# EAGLE board Panelized-TheLittleEngineers.org-27C512E-TO-2532S-V1R1.20.APRIL.2019 (EAGLE 5.10)
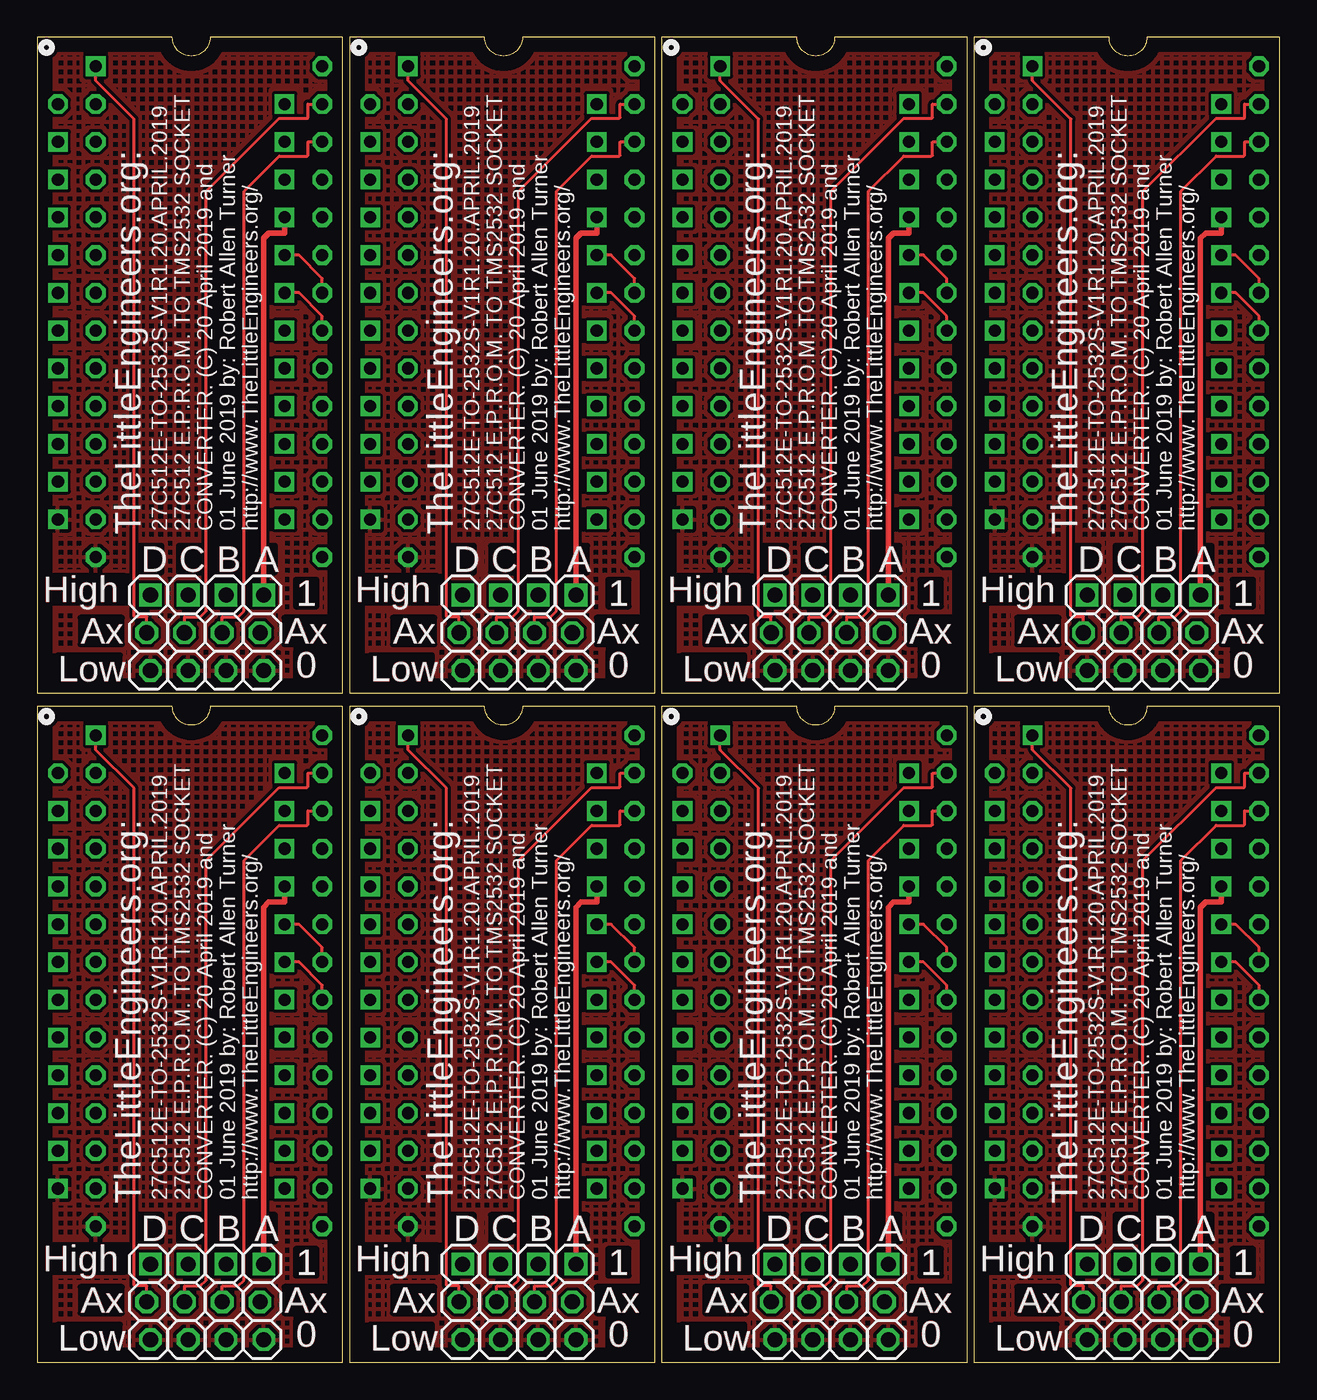
[diagram p0: board, top side]
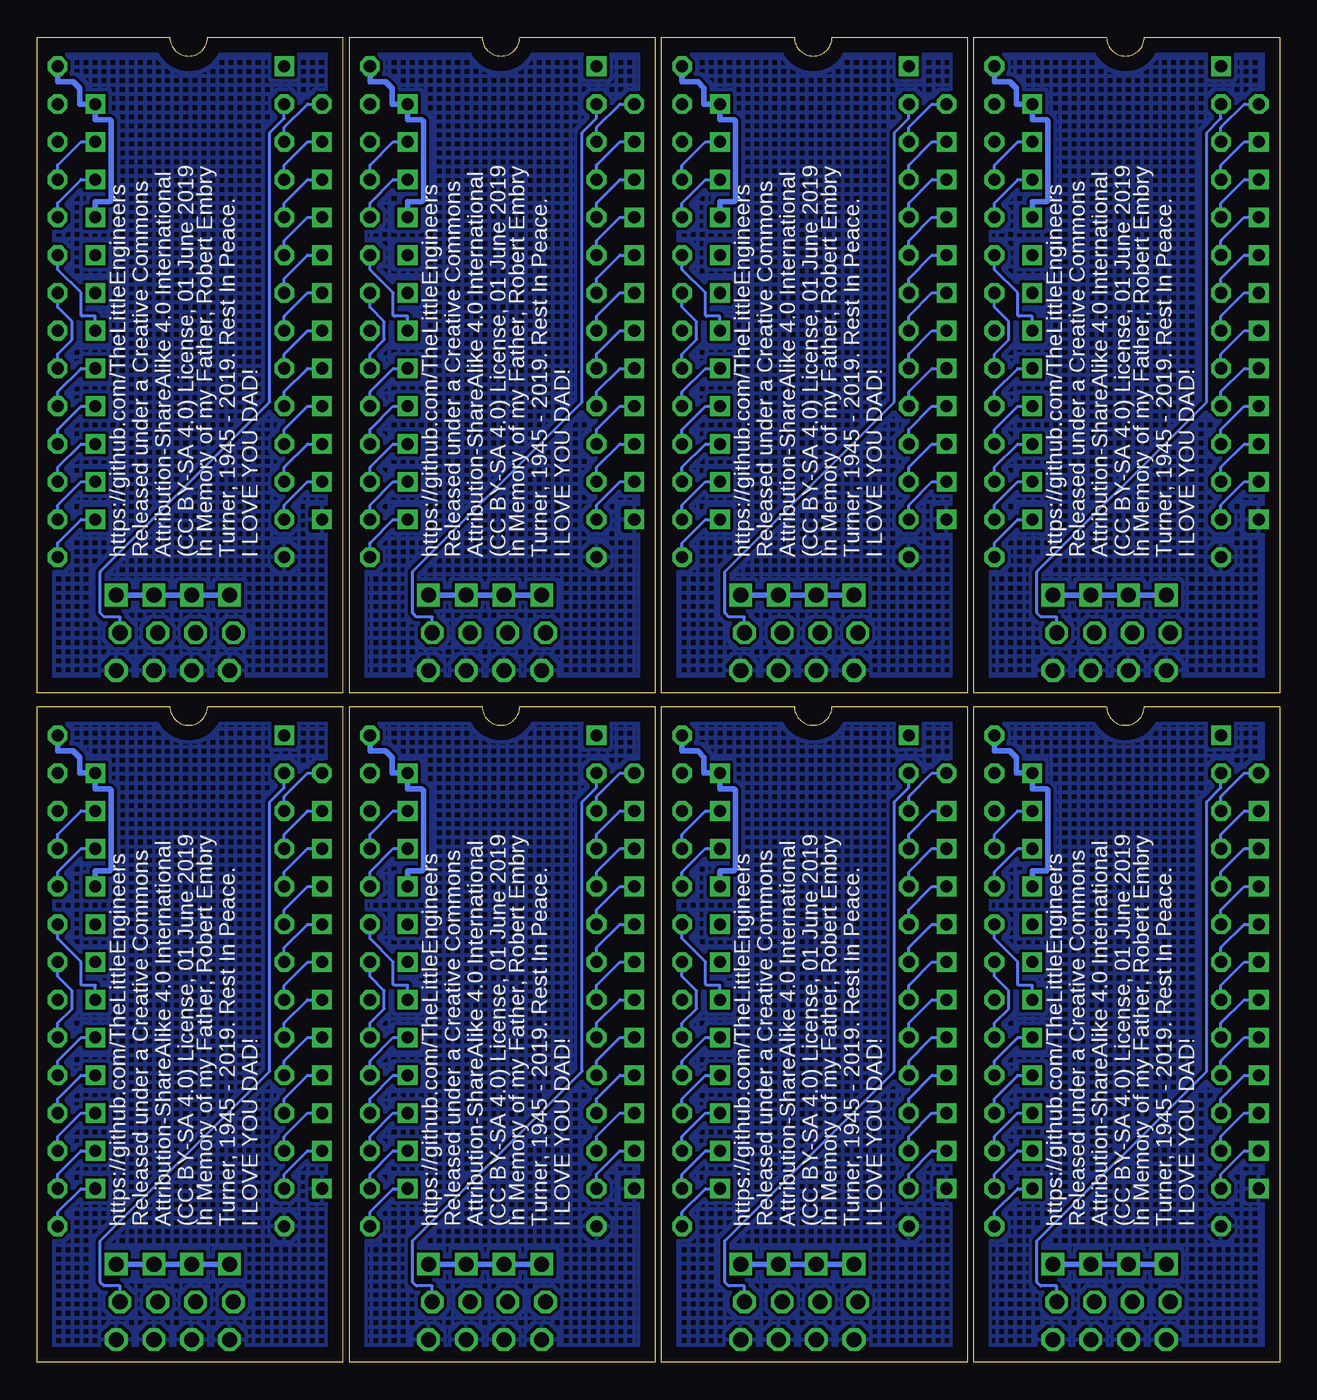
[diagram p1: board, bottom side, seen from below]

Size 83.55 x 89.12 mm. Coordinates in mm from the lower left corner, seen from the top.
Copper layers (1*16): Top 0.035mm / dielectric 1.5mm / Bottom 0.035mm
Design rules "default": minimum track width 10mil, minimum drill 24mil, track to track 8mil, track to pad 8mil, pad to pad 8mil, via to via 8mil, smd to smd 8mil, copper to edge 40mil, drill to drill 8mil, minimum pad ring 10mil, minimum via ring 8mil, stop-mask expansion 4mil, vias tented up to drill 0mil, thermal gap 10mil
Net classes: 0 default: width 0.203 mm, clearance 0.203 mm; 1 power: width 0.381 mm, clearance 0.203 mm

## Footprints (pad centres in the part's own frame; a part is rotated, then mirrored left to right if it is on the bottom)
1X03-STAGGERED = drill 1.016 square: 1 -2.54,0.127 | drill 1.016 octagon: 2 0,-0.127; 3 2.54,0.127
DIL24-6-NO-OUTLINE = drill 0.813 octagon: 1 -13.97,-7.62 | drill 0.813 square: 2 -11.43,-7.62; 3 -8.89,-7.62; 4 -6.35,-7.62; 5 -3.81,-7.62; 6 -1.27,-7.62; 7 1.27,-7.62; 8 3.81,-7.62; 9 6.35,-7.62; 10 8.89,-7.62; 11 11.43,-7.62; 12 13.97,-7.62; 13 13.97,7.62; 14 11.43,7.62; 15 8.89,7.62; 16 6.35,7.62; 17 3.81,7.62; 18 1.27,7.62; 19 -1.27,7.62; 20 -3.81,7.62; 21 -6.35,7.62; 22 -8.89,7.62; 23 -11.43,7.62; 24 -13.97,7.62
DIL28-6-NO-OUTLINE = drill 0.813 square: 1 -16.51,-7.62 | drill 0.813 octagon: 2 -13.97,-7.62; 3 -11.43,-7.62; 4 -8.89,-7.62; 5 -6.35,-7.62; 6 -3.81,-7.62; 7 -1.27,-7.62; 8 1.27,-7.62; 9 3.81,-7.62; 10 6.35,-7.62; 11 8.89,-7.62; 12 11.43,-7.62; 13 13.97,-7.62; 14 16.51,-7.62; 15 16.51,7.62; 16 13.97,7.62; 17 11.43,7.62; 18 8.89,7.62; 19 6.35,7.62; 20 3.81,7.62; 21 1.27,7.62; 22 -1.27,7.62; 23 -3.81,7.62; 24 -6.35,7.62; 25 -8.89,7.62; 26 -11.43,7.62; 27 -13.97,7.62; 28 -16.51,7.62

## Placement (x,y rotation side)
A1  [1X03-STAGGERED]  15.11,49.06 270 top
A2  [1X03-STAGGERED]  12.57,49.06 270 top
A3  [1X03-STAGGERED]  10.03,49.06 270 top
A4  [1X03-STAGGERED]  7.49,49.06 270 top
A5  [1X03-STAGGERED]  36.11,49.06 270 top
A6  [1X03-STAGGERED]  33.57,49.06 270 top
A7  [1X03-STAGGERED]  31.03,49.06 270 top
A8  [1X03-STAGGERED]  28.49,49.06 270 top
A9  [1X03-STAGGERED]  57.11,49.06 270 top
A10  [1X03-STAGGERED]  54.57,49.06 270 top
A11  [1X03-STAGGERED]  52.03,49.06 270 top
A12  [1X03-STAGGERED]  49.49,49.06 270 top
A13  [1X03-STAGGERED]  78.11,49.06 270 top
A14  [1X03-STAGGERED]  75.57,49.06 270 top
A15  [1X03-STAGGERED]  73.03,49.06 270 top
A16  [1X03-STAGGERED]  70.49,49.06 270 top
A17  [1X03-STAGGERED]  15.11,4.06 270 top
A18  [1X03-STAGGERED]  12.57,4.06 270 top
A19  [1X03-STAGGERED]  10.03,4.06 270 top
A20  [1X03-STAGGERED]  7.49,4.06 270 top
A21  [1X03-STAGGERED]  36.11,4.06 270 top
A22  [1X03-STAGGERED]  33.57,4.06 270 top
A23  [1X03-STAGGERED]  31.03,4.06 270 top
A24  [1X03-STAGGERED]  28.49,4.06 270 top
A25  [1X03-STAGGERED]  57.11,4.06 270 top
A26  [1X03-STAGGERED]  54.57,4.06 270 top
A27  [1X03-STAGGERED]  52.03,4.06 270 top
A28  [1X03-STAGGERED]  49.49,4.06 270 top
A29  [1X03-STAGGERED]  78.11,4.06 270 top
A30  [1X03-STAGGERED]  75.57,4.06 270 top
A31  [1X03-STAGGERED]  73.03,4.06 270 top
A32  [1X03-STAGGERED]  70.49,4.06 270 top
IC1  [DIL24-6-NO-OUTLINE]  9.02,70.65 270 top
IC2  [DIL28-6-NO-OUTLINE]  11.56,70.65 270 top
IC3  [DIL24-6-NO-OUTLINE]  30.02,70.65 270 top
IC4  [DIL28-6-NO-OUTLINE]  32.56,70.65 270 top
IC5  [DIL24-6-NO-OUTLINE]  51.02,70.65 270 top
IC6  [DIL28-6-NO-OUTLINE]  53.56,70.65 270 top
IC7  [DIL24-6-NO-OUTLINE]  72.02,70.65 270 top
IC8  [DIL28-6-NO-OUTLINE]  74.56,70.65 270 top
IC9  [DIL24-6-NO-OUTLINE]  9.02,25.65 270 top
IC10  [DIL28-6-NO-OUTLINE]  11.56,25.65 270 top
IC11  [DIL24-6-NO-OUTLINE]  30.02,25.65 270 top
IC12  [DIL28-6-NO-OUTLINE]  32.56,25.65 270 top
IC13  [DIL24-6-NO-OUTLINE]  51.02,25.65 270 top
IC14  [DIL28-6-NO-OUTLINE]  53.56,25.65 270 top
IC15  [DIL24-6-NO-OUTLINE]  72.02,25.65 270 top
IC16  [DIL28-6-NO-OUTLINE]  74.56,25.65 270 top
U$1  [OUTLINE]  1.4,45.25 0 top
U$2  [OUTLINE]  22.4,45.25 0 top
U$3  [OUTLINE]  43.4,45.25 0 top
U$4  [OUTLINE]  64.4,45.25 0 top
U$5  [OUTLINE]  1.4,0.25 0 top
U$6  [OUTLINE]  22.4,0.25 0 top
U$7  [OUTLINE]  43.4,0.25 0 top
U$8  [OUTLINE]  64.4,0.25 0 top

## Library data of the parts
A1-A32 IC1-IC16 U$1-U$8 = TheLittleEngineers.org-27C512E-TO-2532S-V1R0.20.APRIL.2019

## Nets
!CE: IC1.20 IC2.20 IC2.22
!CE1: IC3.20 IC4.20 IC4.22
!CE2: IC5.20 IC6.20 IC6.22
!CE3: IC7.20 IC8.20 IC8.22
!CE4: IC9.20 IC10.20 IC10.22
!CE5: IC11.20 IC12.20 IC12.22
!CE6: IC13.20 IC14.20 IC14.22
!CE7: IC15.20 IC16.20 IC16.22
A0: IC1.8 IC2.10
A1: IC1.7 IC2.9
A2: IC1.6 IC2.8
A3: IC1.5 IC2.7
A4: IC1.4 IC2.6
A5: IC1.3 IC2.5
A6: IC1.2 IC2.4
A7: IC1.1 IC2.3
A8: IC1.23 IC2.25
A9: IC1.22 IC2.24
A10: IC1.19 IC2.21
A11: IC1.18 IC2.23
A12: A1.2 IC2.2
A13: A2.2 IC2.26
A14: A3.2 IC2.27
A15: A4.2 IC2.1
A16: IC3.8 IC4.10
A17: IC3.7 IC4.9
A18: IC3.6 IC4.8
A19: IC3.5 IC4.7
A20: IC3.4 IC4.6
A21: IC3.3 IC4.5
A22: IC3.2 IC4.4
A23: IC3.1 IC4.3
A24: IC3.23 IC4.25
A25: IC3.22 IC4.24
A26: IC3.19 IC4.21
A27: IC3.18 IC4.23
A28: A5.2 IC4.2
A29: A6.2 IC4.26
A30: A7.2 IC4.27
A31: A8.2 IC4.1
A32: IC5.8 IC6.10
A33: IC5.7 IC6.9
A34: IC5.6 IC6.8
A35: IC5.5 IC6.7
A36: IC5.4 IC6.6
A37: IC5.3 IC6.5
A38: IC5.2 IC6.4
A39: IC5.1 IC6.3
A40: IC5.23 IC6.25
A41: IC5.22 IC6.24
A42: IC5.19 IC6.21
A43: IC5.18 IC6.23
A44: A9.2 IC6.2
A45: A10.2 IC6.26
A46: A11.2 IC6.27
A47: A12.2 IC6.1
A48: IC7.8 IC8.10
A49: IC7.7 IC8.9
A50: IC7.6 IC8.8
A51: IC7.5 IC8.7
A52: IC7.4 IC8.6
A53: IC7.3 IC8.5
A54: IC7.2 IC8.4
A55: IC7.1 IC8.3
A56: IC7.23 IC8.25
A57: IC7.22 IC8.24
A58: IC7.19 IC8.21
A59: IC7.18 IC8.23
A60: A13.2 IC8.2
A61: A14.2 IC8.26
A62: A15.2 IC8.27
A63: A16.2 IC8.1
A64: IC9.8 IC10.10
A65: IC9.7 IC10.9
A66: IC9.6 IC10.8
A67: IC9.5 IC10.7
A68: IC9.4 IC10.6
A69: IC9.3 IC10.5
A70: IC9.2 IC10.4
A71: IC9.1 IC10.3
A72: IC9.23 IC10.25
A73: IC9.22 IC10.24
A74: IC9.19 IC10.21
A75: IC9.18 IC10.23
A76: A17.2 IC10.2
A77: A18.2 IC10.26
A78: A19.2 IC10.27
A79: A20.2 IC10.1
A80: IC11.8 IC12.10
A81: IC11.7 IC12.9
A82: IC11.6 IC12.8
A83: IC11.5 IC12.7
A84: IC11.4 IC12.6
A85: IC11.3 IC12.5
A86: IC11.2 IC12.4
A87: IC11.1 IC12.3
A88: IC11.23 IC12.25
A89: IC11.22 IC12.24
A90: IC11.19 IC12.21
A91: IC11.18 IC12.23
A92: A21.2 IC12.2
A93: A22.2 IC12.26
A94: A23.2 IC12.27
A95: A24.2 IC12.1
A96: IC13.8 IC14.10
A97: IC13.7 IC14.9
A98: IC13.6 IC14.8
A99: IC13.5 IC14.7
A100: IC13.4 IC14.6
A101: IC13.3 IC14.5
A102: IC13.2 IC14.4
A103: IC13.1 IC14.3
A104: IC13.23 IC14.25
A105: IC13.22 IC14.24
A106: IC13.19 IC14.21
A107: IC13.18 IC14.23
A108: A25.2 IC14.2
A109: A26.2 IC14.26
A110: A27.2 IC14.27
A111: A28.2 IC14.1
A112: IC15.8 IC16.10
A113: IC15.7 IC16.9
A114: IC15.6 IC16.8
A115: IC15.5 IC16.7
A116: IC15.4 IC16.6
A117: IC15.3 IC16.5
A118: IC15.2 IC16.4
A119: IC15.1 IC16.3
A120: IC15.23 IC16.25
A121: IC15.22 IC16.24
A122: IC15.19 IC16.21
A123: IC15.18 IC16.23
A124: A29.2 IC16.2
A125: A30.2 IC16.26
A126: A31.2 IC16.27
A127: A32.2 IC16.1
D0: IC1.9 IC2.11
D1: IC1.10 IC2.12
D2: IC1.11 IC2.13
D3: IC1.13 IC2.15
D4: IC1.14 IC2.16
D5: IC1.15 IC2.17
D6: IC1.16 IC2.18
D7: IC1.17 IC2.19
D8: IC3.9 IC4.11
D9: IC3.10 IC4.12
D10: IC3.11 IC4.13
D11: IC3.13 IC4.15
D12: IC3.14 IC4.16
D13: IC3.15 IC4.17
D14: IC3.16 IC4.18
D15: IC3.17 IC4.19
D16: IC5.9 IC6.11
D17: IC5.10 IC6.12
D18: IC5.11 IC6.13
D19: IC5.13 IC6.15
D20: IC5.14 IC6.16
D21: IC5.15 IC6.17
D22: IC5.16 IC6.18
D23: IC5.17 IC6.19
D24: IC7.9 IC8.11
D25: IC7.10 IC8.12
D26: IC7.11 IC8.13
D27: IC7.13 IC8.15
D28: IC7.14 IC8.16
D29: IC7.15 IC8.17
D30: IC7.16 IC8.18
D31: IC7.17 IC8.19
D32: IC9.9 IC10.11
D33: IC9.10 IC10.12
D34: IC9.11 IC10.13
D35: IC9.13 IC10.15
D36: IC9.14 IC10.16
D37: IC9.15 IC10.17
D38: IC9.16 IC10.18
D39: IC9.17 IC10.19
D40: IC11.9 IC12.11
D41: IC11.10 IC12.12
D42: IC11.11 IC12.13
D43: IC11.13 IC12.15
D44: IC11.14 IC12.16
D45: IC11.15 IC12.17
D46: IC11.16 IC12.18
D47: IC11.17 IC12.19
D48: IC13.9 IC14.11
D49: IC13.10 IC14.12
D50: IC13.11 IC14.13
D51: IC13.13 IC14.15
D52: IC13.14 IC14.16
D53: IC13.15 IC14.17
D54: IC13.16 IC14.18
D55: IC13.17 IC14.19
D56: IC15.9 IC16.11
D57: IC15.10 IC16.12
D58: IC15.11 IC16.13
D59: IC15.13 IC16.15
D60: IC15.14 IC16.16
D61: IC15.15 IC16.17
D62: IC15.16 IC16.18
D63: IC15.17 IC16.19
GND [power]: A1.3 A2.3 A3.3 A4.3 IC1.12 IC2.14
GND1 [power]: A5.3 A6.3 A7.3 A8.3 IC3.12 IC4.14
GND2 [power]: A9.3 A10.3 A11.3 A12.3 IC5.12 IC6.14
GND3 [power]: A13.3 A14.3 A15.3 A16.3 IC7.12 IC8.14
GND4 [power]: A17.3 A18.3 A19.3 A20.3 IC9.12 IC10.14
GND5 [power]: A21.3 A22.3 A23.3 A24.3 IC11.12 IC12.14
GND6 [power]: A25.3 A26.3 A27.3 A28.3 IC13.12 IC14.14
GND7 [power]: A29.3 A30.3 A31.3 A32.3 IC15.12 IC16.14
VCC [power]: A1.1 A2.1 A3.1 A4.1 IC1.21 IC1.24 IC2.28
VCC1 [power]: A5.1 A6.1 A7.1 A8.1 IC3.21 IC3.24 IC4.28
VCC2 [power]: A9.1 A10.1 A11.1 A12.1 IC5.21 IC5.24 IC6.28
VCC3 [power]: A13.1 A14.1 A15.1 A16.1 IC7.21 IC7.24 IC8.28
VCC4 [power]: A17.1 A18.1 A19.1 A20.1 IC9.21 IC9.24 IC10.28
VCC5 [power]: A21.1 A22.1 A23.1 A24.1 IC11.21 IC11.24 IC12.28
VCC6 [power]: A25.1 A26.1 A27.1 A28.1 IC13.21 IC13.24 IC14.28
VCC7 [power]: A29.1 A30.1 A31.1 A32.1 IC15.21 IC15.24 IC16.28

## Tracks (layer width: path | path; a pad name or v marks a point on that pad's centre or on a via)
!CE
  Top 0.203: IC1.20 17.61,74.46 19.18,72.89 IC2.22
  Bottom 0.203: IC2.22 19.18,70.96 18.21,69.99 18.21,68.78 19.18,67.81 IC2.20
!CE1
  Top 0.203: IC3.20 38.6,74.46 40.18,72.89 IC4.22
  Bottom 0.203: IC4.22 40.18,70.96 39.21,69.99 39.21,68.78 40.18,67.81 IC4.20
!CE2
  Top 0.203: IC5.20 59.6,74.46 61.18,72.89 IC6.22
  Bottom 0.203: IC6.22 61.18,70.96 60.21,69.99 60.21,68.78 61.18,67.81 IC6.20
!CE3
  Top 0.203: IC7.20 80.61,74.46 82.18,72.89 IC8.22
  Bottom 0.203: IC8.22 82.18,70.96 81.21,69.99 81.21,68.78 82.18,67.81 IC8.20
!CE4
  Top 0.203: IC9.20 17.61,29.46 19.18,27.89 IC10.22
  Bottom 0.203: IC10.22 19.18,25.96 18.21,24.99 18.21,23.78 19.18,22.81 IC10.20
!CE5
  Top 0.203: IC11.20 38.6,29.46 40.18,27.89 IC12.22
  Bottom 0.203: IC12.22 40.18,25.96 39.21,24.99 39.21,23.78 40.18,22.81 IC12.20
!CE6
  Top 0.203: IC13.20 59.6,29.46 61.18,27.89 IC14.22
  Bottom 0.203: IC14.22 61.18,25.96 60.21,24.99 60.21,23.78 61.18,22.81 IC14.20
!CE7
  Top 0.203: IC15.20 80.61,29.46 82.18,27.89 IC16.22
  Bottom 0.203: IC16.22 82.18,25.96 81.21,24.99 81.21,23.78 82.18,22.81 IC16.20
A0
  Bottom 0.203: IC1.8 2.37,66.84 3.94,65.27 IC2.10
A1
  Bottom 0.203: IC1.7 2.37,69.38 3.94,67.81 IC2.9
A2
  Bottom 0.203: IC1.6 2.37,71.92 3.94,70.35 IC2.8
A3
  Bottom 0.203: IC1.5 2.37,74.46 3.94,72.89 IC2.7
A4
  Bottom 0.203: IC1.4 2.37,77 3.94,75.43 IC2.6
A5
  Bottom 0.203: IC1.3 2.37,79.54 3.94,77.97 IC2.5
A6
  Bottom 0.203: IC1.2 2.37,82.08 3.94,80.51 IC2.4
A7
  Bottom 0.203: IC1.1 2.37,84.62 3.94,83.05 IC2.3
A8
  Bottom 0.203: IC1.23 17.61,82.08 19.18,80.51 IC2.25
A9
  Bottom 0.203: IC1.22 17.61,79.54 19.18,77.97 IC2.24
A10
  Top 0.203: IC1.19 17.61,71.92 19.18,70.35 IC2.21
A11
  Bottom 0.203: IC1.18 16.64,70.35 17.55,70.35 17.61,70.41 17.61,71.92 19.18,73.5 IC2.23
A12
  Bottom 0.203: A1.2 14.99,50.13 16.05,50.13 16.31,50.39 16.31,53.17 4.91,64.58 4.91,82.69 3.94,83.66 IC2.2
A13
  Top 0.203: A2.2 12.45,50.13 13.52,50.13 13.91,50.53 13.91,78.75 16.28,81.12 18.15,81.12 18.21,81.17 18.21,82.08 IC2.26
A14
  Top 0.203: A3.2 9.91,50.13 10.97,50.13 11.37,50.53 11.37,78.75 16.28,83.66 18.15,83.66 18.21,83.71 18.21,84.62 IC2.27
A15
  Top 0.203: A4.2 7.37,50.13 6.58,50.13 6.52,50.19 6.52,83.61 3.94,86.2 IC2.1
A16
  Bottom 0.203: IC3.8 23.36,66.84 24.94,65.27 IC4.10
A17
  Bottom 0.203: IC3.7 23.36,69.38 24.94,67.81 IC4.9
A18
  Bottom 0.203: IC3.6 23.36,71.92 24.94,70.35 IC4.8
A19
  Bottom 0.203: IC3.5 23.36,74.46 24.94,72.89 IC4.7
A20
  Bottom 0.203: IC3.4 23.36,77 24.94,75.43 IC4.6
A21
  Bottom 0.203: IC3.3 23.36,79.54 24.94,77.97 IC4.5
A22
  Bottom 0.203: IC3.2 23.36,82.08 24.94,80.51 IC4.4
A23
  Bottom 0.203: IC3.1 23.36,84.62 24.94,83.05 IC4.3
A24
  Bottom 0.203: IC3.23 38.6,82.08 40.18,80.51 IC4.25
A25
  Bottom 0.203: IC3.22 38.6,79.54 40.18,77.97 IC4.24
A26
  Top 0.203: IC3.19 38.6,71.92 40.18,70.35 IC4.21
A27
  Bottom 0.203: IC3.18 37.64,70.35 38.55,70.35 38.6,70.41 38.6,71.92 40.18,73.5 IC4.23
A28
  Bottom 0.203: A5.2 35.99,50.13 37.05,50.13 37.31,50.39 37.31,53.17 25.91,64.58 25.91,82.69 24.94,83.66 IC4.2
A29
  Top 0.203: A6.2 33.45,50.13 34.52,50.13 34.91,50.53 34.91,78.75 37.28,81.12 39.15,81.12 39.21,81.17 39.21,82.08 IC4.26
A30
  Top 0.203: A7.2 30.91,50.13 31.98,50.13 32.37,50.53 32.37,78.75 37.28,83.66 39.15,83.66 39.21,83.71 39.21,84.62 IC4.27
A31
  Top 0.203: A8.2 28.37,50.13 27.58,50.13 27.52,50.19 27.52,83.61 24.94,86.2 IC4.1
A32
  Bottom 0.203: IC5.8 44.37,66.84 45.94,65.27 IC6.10
A33
  Bottom 0.203: IC5.7 44.37,69.38 45.94,67.81 IC6.9
A34
  Bottom 0.203: IC5.6 44.37,71.92 45.94,70.35 IC6.8
A35
  Bottom 0.203: IC5.5 44.37,74.46 45.94,72.89 IC6.7
A36
  Bottom 0.203: IC5.4 44.37,77 45.94,75.43 IC6.6
A37
  Bottom 0.203: IC5.3 44.37,79.54 45.94,77.97 IC6.5
A38
  Bottom 0.203: IC5.2 44.37,82.08 45.94,80.51 IC6.4
A39
  Bottom 0.203: IC5.1 44.37,84.62 45.94,83.05 IC6.3
A40
  Bottom 0.203: IC5.23 59.6,82.08 61.18,80.51 IC6.25
A41
  Bottom 0.203: IC5.22 59.6,79.54 61.18,77.97 IC6.24
A42
  Top 0.203: IC5.19 59.6,71.92 61.18,70.35 IC6.21
A43
  Bottom 0.203: IC5.18 58.64,70.35 59.55,70.35 59.6,70.41 59.6,71.92 61.18,73.5 IC6.23
A44
  Bottom 0.203: A9.2 56.99,50.13 58.05,50.13 58.31,50.39 58.31,53.17 46.91,64.58 46.91,82.69 45.94,83.66 IC6.2
A45
  Top 0.203: A10.2 54.45,50.13 55.52,50.13 55.91,50.53 55.91,78.75 58.28,81.12 60.15,81.12 60.21,81.17 60.21,82.08 IC6.26
A46
  Top 0.203: A11.2 51.91,50.13 52.98,50.13 53.37,50.53 53.37,78.75 58.28,83.66 60.15,83.66 60.21,83.71 60.21,84.62 IC6.27
A47
  Top 0.203: A12.2 49.37,50.13 48.58,50.13 48.52,50.19 48.52,83.61 45.94,86.2 IC6.1
A48
  Bottom 0.203: IC7.8 65.36,66.84 66.94,65.27 IC8.10
A49
  Bottom 0.203: IC7.7 65.36,69.38 66.94,67.81 IC8.9
A50
  Bottom 0.203: IC7.6 65.36,71.92 66.94,70.35 IC8.8
A51
  Bottom 0.203: IC7.5 65.36,74.46 66.94,72.89 IC8.7
A52
  Bottom 0.203: IC7.4 65.36,77 66.94,75.43 IC8.6
A53
  Bottom 0.203: IC7.3 65.36,79.54 66.94,77.97 IC8.5
A54
  Bottom 0.203: IC7.2 65.36,82.08 66.94,80.51 IC8.4
A55
  Bottom 0.203: IC7.1 65.36,84.62 66.94,83.05 IC8.3
A56
  Bottom 0.203: IC7.23 80.61,82.08 82.18,80.51 IC8.25
A57
  Bottom 0.203: IC7.22 80.61,79.54 82.18,77.97 IC8.24
A58
  Top 0.203: IC7.19 80.61,71.92 82.18,70.35 IC8.21
A59
  Bottom 0.203: IC7.18 79.64,70.35 80.55,70.35 80.61,70.41 80.61,71.92 82.18,73.5 IC8.23
A60
  Bottom 0.203: A13.2 77.99,50.13 79.06,50.13 79.31,50.39 79.31,53.17 67.91,64.58 67.91,82.69 66.94,83.66 IC8.2
A61
  Top 0.203: A14.2 75.45,50.13 76.52,50.13 76.91,50.53 76.91,78.75 79.28,81.12 81.15,81.12 81.21,81.17 81.21,82.08 IC8.26
A62
  Top 0.203: A15.2 72.91,50.13 73.97,50.13 74.37,50.53 74.37,78.75 79.28,83.66 81.15,83.66 81.21,83.71 81.21,84.62 IC8.27
A63
  Top 0.203: A16.2 70.37,50.13 69.58,50.13 69.52,50.19 69.52,83.61 66.94,86.2 IC8.1
A64
  Bottom 0.203: IC9.8 2.37,21.84 3.94,20.27 IC10.10
A65
  Bottom 0.203: IC9.7 2.37,24.38 3.94,22.81 IC10.9
A66
  Bottom 0.203: IC9.6 2.37,26.92 3.94,25.35 IC10.8
A67
  Bottom 0.203: IC9.5 2.37,29.46 3.94,27.89 IC10.7
A68
  Bottom 0.203: IC9.4 2.37,32 3.94,30.43 IC10.6
A69
  Bottom 0.203: IC9.3 2.37,34.54 3.94,32.97 IC10.5
A70
  Bottom 0.203: IC9.2 2.37,37.08 3.94,35.51 IC10.4
A71
  Bottom 0.203: IC9.1 2.37,39.62 3.94,38.05 IC10.3
A72
  Bottom 0.203: IC9.23 17.61,37.08 19.18,35.51 IC10.25
A73
  Bottom 0.203: IC9.22 17.61,34.54 19.18,32.97 IC10.24
A74
  Top 0.203: IC9.19 17.61,26.92 19.18,25.35 IC10.21
A75
  Bottom 0.203: IC9.18 16.64,25.35 17.55,25.35 17.61,25.41 17.61,26.92 19.18,28.5 IC10.23
A76
  Bottom 0.203: A17.2 14.99,5.13 16.05,5.13 16.31,5.39 16.31,8.17 4.91,19.58 4.91,37.69 3.94,38.66 IC10.2
A77
  Top 0.203: A18.2 12.45,5.13 13.52,5.13 13.91,5.53 13.91,33.75 16.28,36.12 18.15,36.12 18.21,36.17 18.21,37.08 IC10.26
A78
  Top 0.203: A19.2 9.91,5.13 10.97,5.13 11.37,5.53 11.37,33.75 16.28,38.66 18.15,38.66 18.21,38.71 18.21,39.62 IC10.27
A79
  Top 0.203: A20.2 7.37,5.13 6.58,5.13 6.52,5.19 6.52,38.61 3.94,41.2 IC10.1
A80
  Bottom 0.203: IC11.8 23.36,21.84 24.94,20.27 IC12.10
A81
  Bottom 0.203: IC11.7 23.36,24.38 24.94,22.81 IC12.9
A82
  Bottom 0.203: IC11.6 23.36,26.92 24.94,25.35 IC12.8
A83
  Bottom 0.203: IC11.5 23.36,29.46 24.94,27.89 IC12.7
A84
  Bottom 0.203: IC11.4 23.36,32 24.94,30.43 IC12.6
A85
  Bottom 0.203: IC11.3 23.36,34.54 24.94,32.97 IC12.5
A86
  Bottom 0.203: IC11.2 23.36,37.08 24.94,35.51 IC12.4
A87
  Bottom 0.203: IC11.1 23.36,39.62 24.94,38.05 IC12.3
A88
  Bottom 0.203: IC11.23 38.6,37.08 40.18,35.51 IC12.25
A89
  Bottom 0.203: IC11.22 38.6,34.54 40.18,32.97 IC12.24
A90
  Top 0.203: IC11.19 38.6,26.92 40.18,25.35 IC12.21
A91
  Bottom 0.203: IC11.18 37.64,25.35 38.55,25.35 38.6,25.41 38.6,26.92 40.18,28.5 IC12.23
A92
  Bottom 0.203: A21.2 35.99,5.13 37.05,5.13 37.31,5.39 37.31,8.17 25.91,19.58 25.91,37.69 24.94,38.66 IC12.2
A93
  Top 0.203: A22.2 33.45,5.13 34.52,5.13 34.91,5.53 34.91,33.75 37.28,36.12 39.15,36.12 39.21,36.17 39.21,37.08 IC12.26
A94
  Top 0.203: A23.2 30.91,5.13 31.98,5.13 32.37,5.53 32.37,33.75 37.28,38.66 39.15,38.66 39.21,38.71 39.21,39.62 IC12.27
A95
  Top 0.203: A24.2 28.37,5.13 27.58,5.13 27.52,5.19 27.52,38.61 24.94,41.2 IC12.1
A96
  Bottom 0.203: IC13.8 44.37,21.84 45.94,20.27 IC14.10
A97
  Bottom 0.203: IC13.7 44.37,24.38 45.94,22.81 IC14.9
A98
  Bottom 0.203: IC13.6 44.37,26.92 45.94,25.35 IC14.8
A99
  Bottom 0.203: IC13.5 44.37,29.46 45.94,27.89 IC14.7
A100
  Bottom 0.203: IC13.4 44.37,32 45.94,30.43 IC14.6
A101
  Bottom 0.203: IC13.3 44.37,34.54 45.94,32.97 IC14.5
A102
  Bottom 0.203: IC13.2 44.37,37.08 45.94,35.51 IC14.4
A103
  Bottom 0.203: IC13.1 44.37,39.62 45.94,38.05 IC14.3
A104
  Bottom 0.203: IC13.23 59.6,37.08 61.18,35.51 IC14.25
A105
  Bottom 0.203: IC13.22 59.6,34.54 61.18,32.97 IC14.24
A106
  Top 0.203: IC13.19 59.6,26.92 61.18,25.35 IC14.21
A107
  Bottom 0.203: IC13.18 58.64,25.35 59.55,25.35 59.6,25.41 59.6,26.92 61.18,28.5 IC14.23
A108
  Bottom 0.203: A25.2 56.99,5.13 58.05,5.13 58.31,5.39 58.31,8.17 46.91,19.58 46.91,37.69 45.94,38.66 IC14.2
A109
  Top 0.203: A26.2 54.45,5.13 55.52,5.13 55.91,5.53 55.91,33.75 58.28,36.12 60.15,36.12 60.21,36.17 60.21,37.08 IC14.26
A110
  Top 0.203: A27.2 51.91,5.13 52.98,5.13 53.37,5.53 53.37,33.75 58.28,38.66 60.15,38.66 60.21,38.71 60.21,39.62 IC14.27
A111
  Top 0.203: A28.2 49.37,5.13 48.58,5.13 48.52,5.19 48.52,38.61 45.94,41.2 IC14.1
A112
  Bottom 0.203: IC15.8 65.36,21.84 66.94,20.27 IC16.10
A113
  Bottom 0.203: IC15.7 65.36,24.38 66.94,22.81 IC16.9
A114
  Bottom 0.203: IC15.6 65.36,26.92 66.94,25.35 IC16.8
A115
  Bottom 0.203: IC15.5 65.36,29.46 66.94,27.89 IC16.7
A116
  Bottom 0.203: IC15.4 65.36,32 66.94,30.43 IC16.6
A117
  Bottom 0.203: IC15.3 65.36,34.54 66.94,32.97 IC16.5
A118
  Bottom 0.203: IC15.2 65.36,37.08 66.94,35.51 IC16.4
A119
  Bottom 0.203: IC15.1 65.36,39.62 66.94,38.05 IC16.3
A120
  Bottom 0.203: IC15.23 80.61,37.08 82.18,35.51 IC16.25
A121
  Bottom 0.203: IC15.22 80.61,34.54 82.18,32.97 IC16.24
A122
  Top 0.203: IC15.19 80.61,26.92 82.18,25.35 IC16.21
A123
  Bottom 0.203: IC15.18 79.64,25.35 80.55,25.35 80.61,25.41 80.61,26.92 82.18,28.5 IC16.23
A124
  Bottom 0.203: A29.2 77.99,5.13 79.06,5.13 79.31,5.39 79.31,8.17 67.91,19.58 67.91,37.69 66.94,38.66 IC16.2
A125
  Top 0.203: A30.2 75.45,5.13 76.52,5.13 76.91,5.53 76.91,33.75 79.28,36.12 81.15,36.12 81.21,36.17 81.21,37.08 IC16.26
A126
  Top 0.203: A31.2 72.91,5.13 73.97,5.13 74.37,5.53 74.37,33.75 79.28,38.66 81.15,38.66 81.21,38.71 81.21,39.62 IC16.27
A127
  Top 0.203: A32.2 70.37,5.13 69.58,5.13 69.52,5.19 69.52,38.61 66.94,41.2 IC16.1
D0
  Bottom 0.203: IC1.9 2.37,64.3 3.94,62.73 IC2.11
D1
  Bottom 0.203: IC1.10 2.37,61.76 3.94,60.19 IC2.12
D2
  Bottom 0.203: IC1.11 2.37,59.22 3.94,57.65 IC2.13
D3
  Bottom 0.203: IC1.13 17.61,56.68 19.18,55.11 IC2.15
D4
  Bottom 0.203: IC1.14 17.61,59.22 19.18,57.65 IC2.16
D5
  Bottom 0.203: IC1.15 17.61,61.76 19.18,60.19 IC2.17
D6
  Bottom 0.203: IC1.16 17.61,64.3 19.18,62.73 IC2.18
D7
  Bottom 0.203: IC1.17 17.61,66.84 19.18,65.27 IC2.19
D8
  Bottom 0.203: IC3.9 23.36,64.3 24.94,62.73 IC4.11
D9
  Bottom 0.203: IC3.10 23.36,61.76 24.94,60.19 IC4.12
D10
  Bottom 0.203: IC3.11 23.36,59.22 24.94,57.65 IC4.13
D11
  Bottom 0.203: IC3.13 38.6,56.68 40.18,55.11 IC4.15
D12
  Bottom 0.203: IC3.14 38.6,59.22 40.18,57.65 IC4.16
D13
  Bottom 0.203: IC3.15 38.6,61.76 40.18,60.19 IC4.17
D14
  Bottom 0.203: IC3.16 38.6,64.3 40.18,62.73 IC4.18
D15
  Bottom 0.203: IC3.17 38.6,66.84 40.18,65.27 IC4.19
D16
  Bottom 0.203: IC5.9 44.37,64.3 45.94,62.73 IC6.11
D17
  Bottom 0.203: IC5.10 44.37,61.76 45.94,60.19 IC6.12
D18
  Bottom 0.203: IC5.11 44.37,59.22 45.94,57.65 IC6.13
D19
  Bottom 0.203: IC5.13 59.6,56.68 61.18,55.11 IC6.15
D20
  Bottom 0.203: IC5.14 59.6,59.22 61.18,57.65 IC6.16
D21
  Bottom 0.203: IC5.15 59.6,61.76 61.18,60.19 IC6.17
D22
  Bottom 0.203: IC5.16 59.6,64.3 61.18,62.73 IC6.18
D23
  Bottom 0.203: IC5.17 59.6,66.84 61.18,65.27 IC6.19
D24
  Bottom 0.203: IC7.9 65.36,64.3 66.94,62.73 IC8.11
D25
  Bottom 0.203: IC7.10 65.36,61.76 66.94,60.19 IC8.12
D26
  Bottom 0.203: IC7.11 65.36,59.22 66.94,57.65 IC8.13
D27
  Bottom 0.203: IC7.13 80.61,56.68 82.18,55.11 IC8.15
D28
  Bottom 0.203: IC7.14 80.61,59.22 82.18,57.65 IC8.16
D29
  Bottom 0.203: IC7.15 80.61,61.76 82.18,60.19 IC8.17
D30
  Bottom 0.203: IC7.16 80.61,64.3 82.18,62.73 IC8.18
D31
  Bottom 0.203: IC7.17 80.61,66.84 82.18,65.27 IC8.19
D32
  Bottom 0.203: IC9.9 2.37,19.3 3.94,17.73 IC10.11
D33
  Bottom 0.203: IC9.10 2.37,16.76 3.94,15.19 IC10.12
D34
  Bottom 0.203: IC9.11 2.37,14.22 3.94,12.65 IC10.13
D35
  Bottom 0.203: IC9.13 17.61,11.68 19.18,10.11 IC10.15
D36
  Bottom 0.203: IC9.14 17.61,14.22 19.18,12.65 IC10.16
D37
  Bottom 0.203: IC9.15 17.61,16.76 19.18,15.19 IC10.17
D38
  Bottom 0.203: IC9.16 17.61,19.3 19.18,17.73 IC10.18
D39
  Bottom 0.203: IC9.17 17.61,21.84 19.18,20.27 IC10.19
D40
  Bottom 0.203: IC11.9 23.36,19.3 24.94,17.73 IC12.11
D41
  Bottom 0.203: IC11.10 23.36,16.76 24.94,15.19 IC12.12
D42
  Bottom 0.203: IC11.11 23.36,14.22 24.94,12.65 IC12.13
D43
  Bottom 0.203: IC11.13 38.6,11.68 40.18,10.11 IC12.15
D44
  Bottom 0.203: IC11.14 38.6,14.22 40.18,12.65 IC12.16
D45
  Bottom 0.203: IC11.15 38.6,16.76 40.18,15.19 IC12.17
D46
  Bottom 0.203: IC11.16 38.6,19.3 40.18,17.73 IC12.18
D47
  Bottom 0.203: IC11.17 38.6,21.84 40.18,20.27 IC12.19
D48
  Bottom 0.203: IC13.9 44.37,19.3 45.94,17.73 IC14.11
D49
  Bottom 0.203: IC13.10 44.37,16.76 45.94,15.19 IC14.12
D50
  Bottom 0.203: IC13.11 44.37,14.22 45.94,12.65 IC14.13
D51
  Bottom 0.203: IC13.13 59.6,11.68 61.18,10.11 IC14.15
D52
  Bottom 0.203: IC13.14 59.6,14.22 61.18,12.65 IC14.16
D53
  Bottom 0.203: IC13.15 59.6,16.76 61.18,15.19 IC14.17
D54
  Bottom 0.203: IC13.16 59.6,19.3 61.18,17.73 IC14.18
D55
  Bottom 0.203: IC13.17 59.6,21.84 61.18,20.27 IC14.19
D56
  Bottom 0.203: IC15.9 65.36,19.3 66.94,17.73 IC16.11
D57
  Bottom 0.203: IC15.10 65.36,16.76 66.94,15.19 IC16.12
D58
  Bottom 0.203: IC15.11 65.36,14.22 66.94,12.65 IC16.13
D59
  Bottom 0.203: IC15.13 80.61,11.68 82.18,10.11 IC16.15
D60
  Bottom 0.203: IC15.14 80.61,14.22 82.18,12.65 IC16.16
D61
  Bottom 0.203: IC15.15 80.61,16.76 82.18,15.19 IC16.17
D62
  Bottom 0.203: IC15.16 80.61,19.3 82.18,17.73 IC16.18
D63
  Bottom 0.203: IC15.17 80.61,21.84 82.18,20.27 IC16.19
GND
  pour Top (hatched): -0.13,89.2 20.7,89.2 20.7,45 -0.13,45
  pour Bottom (hatched): -0.13,89.2 20.7,89.2 20.7,45 -0.13,45
GND1
  pour Top (hatched): 20.87,89.2 41.7,89.2 41.7,45 20.87,45
  pour Bottom (hatched): 20.87,89.2 41.7,89.2 41.7,45 20.87,45
GND2
  pour Top (hatched): 41.87,89.2 62.7,89.2 62.7,45 41.87,45
  pour Bottom (hatched): 41.87,89.2 62.7,89.2 62.7,45 41.87,45
GND3
  pour Top (hatched): 62.87,89.2 83.7,89.2 83.7,45 62.87,45
  pour Bottom (hatched): 62.87,89.2 83.7,89.2 83.7,45 62.87,45
GND4
  pour Top (hatched): -0.13,44.2 20.7,44.2 20.7,0 -0.13,0
  pour Bottom (hatched): -0.13,44.2 20.7,44.2 20.7,0 -0.13,0
GND5
  pour Top (hatched): 20.87,44.2 41.7,44.2 41.7,0 20.87,0
  pour Bottom (hatched): 20.87,44.2 41.7,44.2 41.7,0 20.87,0
GND6
  pour Top (hatched): 41.87,44.2 62.7,44.2 62.7,0 41.87,0
  pour Bottom (hatched): 41.87,44.2 62.7,44.2 62.7,0 41.87,0
GND7
  pour Top (hatched): 62.87,44.2 83.7,44.2 83.7,0 62.87,0
  pour Bottom (hatched): 62.87,44.2 83.7,44.2 83.7,0 62.87,0
VCC
  Top 0.381: IC1.21 16.64,75.95 15.58,75.95 15.24,75.61 A1.1
  Bottom 0.381: IC2.28 19.18,86.11 18.12,86.11 17.69,85.68 17.69,84.62 IC1.24 16.64,83.57 15.69,83.57 15.58,83.46 15.58,78.17 15.69,78.06 16.64,78.06 IC1.21 | A1.1 A2.1 A3.1 A4.1
VCC1
  Top 0.381: IC3.21 37.64,75.95 36.58,75.95 36.24,75.61 A5.1
  Bottom 0.381: IC4.28 40.18,86.11 39.12,86.11 38.69,85.68 38.69,84.62 IC3.24 37.64,83.57 36.69,83.57 36.58,83.46 36.58,78.17 36.69,78.06 37.64,78.06 IC3.21 | A5.1 A6.1 A7.1 A8.1
VCC2
  Top 0.381: IC5.21 58.64,75.95 57.58,75.95 57.24,75.61 A9.1
  Bottom 0.381: IC6.28 61.18,86.11 60.12,86.11 59.69,85.68 59.69,84.62 IC5.24 58.64,83.57 57.69,83.57 57.58,83.46 57.58,78.17 57.69,78.06 58.64,78.06 IC5.21 | A9.1 A10.1 A11.1 A12.1
VCC3
  Top 0.381: IC7.21 79.64,75.95 78.58,75.95 78.24,75.61 A13.1
  Bottom 0.381: IC8.28 82.18,86.11 81.12,86.11 80.69,85.68 80.69,84.62 IC7.24 79.64,83.57 78.69,83.57 78.58,83.46 78.58,78.17 78.69,78.06 79.64,78.06 IC7.21 | A13.1 A14.1 A15.1 A16.1
VCC4
  Top 0.381: IC9.21 16.64,30.95 15.58,30.95 15.24,30.61 A17.1
  Bottom 0.381: IC10.28 19.18,41.11 18.12,41.11 17.69,40.68 17.69,39.62 IC9.24 16.64,38.57 15.69,38.57 15.58,38.46 15.58,33.17 15.69,33.06 16.64,33.06 IC9.21 | A17.1 A18.1 A19.1 A20.1
VCC5
  Top 0.381: IC11.21 37.64,30.95 36.58,30.95 36.24,30.61 A21.1
  Bottom 0.381: IC12.28 40.18,41.11 39.12,41.11 38.69,40.68 38.69,39.62 IC11.24 37.64,38.57 36.69,38.57 36.58,38.46 36.58,33.17 36.69,33.06 37.64,33.06 IC11.21 | A21.1 A22.1 A23.1 A24.1
VCC6
  Top 0.381: IC13.21 58.64,30.95 57.58,30.95 57.24,30.61 A25.1
  Bottom 0.381: IC14.28 61.18,41.11 60.12,41.11 59.69,40.68 59.69,39.62 IC13.24 58.64,38.57 57.69,38.57 57.58,38.46 57.58,33.17 57.69,33.06 58.64,33.06 IC13.21 | A25.1 A26.1 A27.1 A28.1
VCC7
  Top 0.381: IC15.21 79.64,30.95 78.58,30.95 78.24,30.61 A29.1
  Bottom 0.381: IC16.28 82.18,41.11 81.12,41.11 80.69,40.68 80.69,39.62 IC15.24 79.64,38.57 78.69,38.57 78.58,38.46 78.58,33.17 78.69,33.06 79.64,33.06 IC15.21 | A29.1 A30.1 A31.1 A32.1
(copper drawn outside any net)
  shapes: Top circle x8

## Text on the board
Top: D | C | B | A | D | C | B | A | D | C | B | A | D | C | B | A | High | 1 | High | 1 | High | 1 | High | 1 | Ax | Ax | Ax | Ax | Ax | Ax | Ax | Ax | 0 | 0 | 0 | 0 | Low | Low | Low | Low | D | C | B | A | D | C | B | A | D | C | B | A | D | C | B | A | High | 1 | High | 1 | High | 1 | High | 1 | Ax | Ax | Ax | Ax | Ax | Ax | Ax | Ax | 0 | 0 | 0 | 0 | Low | Low | Low | Low
tPlace: 27C512E-TO-2532S-V1R1.20.APRIL.2019 | 27C512 E.P.R.O.M. TO TMS2532 SOCKET | CONVERTER. (C) 20 April 2019 and | 01 June 2019 by: Robert Allen Turner | http://www.TheLittleEngineers.org/ | 27C512E-TO-2532S-V1R1.20.APRIL.2019 | 27C512 E.P.R.O.M. TO TMS2532 SOCKET | CONVERTER. (C) 20 April 2019 and | 01 June 2019 by: Robert Allen Turner | http://www.TheLittleEngineers.org/ | 27C512E-TO-2532S-V1R1.20.APRIL.2019 | 27C512 E.P.R.O.M. TO TMS2532 SOCKET | CONVERTER. (C) 20 April 2019 and | 01 June 2019 by: Robert Allen Turner | http://www.TheLittleEngineers.org/ | 27C512E-TO-2532S-V1R1.20.APRIL.2019 | 27C512 E.P.R.O.M. TO TMS2532 SOCKET | CONVERTER. (C) 20 April 2019 and | 01 June 2019 by: Robert Allen Turner | http://www.TheLittleEngineers.org/ | TheLittleEngineers.org: | TheLittleEngineers.org: | TheLittleEngineers.org: | TheLittleEngineers.org: | D | C | B | A | D | C | B | A | D | C | B | A | D | C | B | A | High | 1 | High | 1 | High | 1 | High | 1 | Ax | Ax | Ax | Ax | Ax | Ax | Ax | Ax | 0 | 0 | 0 | 0 | Low | Low | Low | Low | 27C512E-TO-2532S-V1R1.20.APRIL.2019 | 27C512 E.P.R.O.M. TO TMS2532 SOCKET | CONVERTER. (C) 20 April 2019 and | 01 June 2019 by: Robert Allen Turner | http://www.TheLittleEngineers.org/ | 27C512E-TO-2532S-V1R1.20.APRIL.2019 | 27C512 E.P.R.O.M. TO TMS2532 SOCKET | CONVERTER. (C) 20 April 2019 and | 01 June 2019 by: Robert Allen Turner | http://www.TheLittleEngineers.org/ | 27C512E-TO-2532S-V1R1.20.APRIL.2019 | 27C512 E.P.R.O.M. TO TMS2532 SOCKET | CONVERTER. (C) 20 April 2019 and | 01 June 2019 by: Robert Allen Turner | http://www.TheLittleEngineers.org/ | 27C512E-TO-2532S-V1R1.20.APRIL.2019 | 27C512 E.P.R.O.M. TO TMS2532 SOCKET | CONVERTER. (C) 20 April 2019 and | 01 June 2019 by: Robert Allen Turner | http://www.TheLittleEngineers.org/ | TheLittleEngineers.org: | TheLittleEngineers.org: | TheLittleEngineers.org: | TheLittleEngineers.org: | D | C | B | A | D | C | B | A | D | C | B | A | D | C | B | A | High | 1 | High | 1 | High | 1 | High | 1 | Ax | Ax | Ax | Ax | Ax | Ax | Ax | Ax | 0 | 0 | 0 | 0 | Low | Low | Low | Low
bPlace: I LOVE YOU DAD! | Turner, 1945 - 2019. Rest In Peace. | In Memory of my Father, Robert Embry | (CC BY-SA 4.0) License, 01 June 2019 | Attribution-ShareAlike 4.0 International | Released under a Creative Commons | https://github.com/TheLittleEngineers | I LOVE YOU DAD! | Turner, 1945 - 2019. Rest In Peace. | In Memory of my Father, Robert Embry | (CC BY-SA 4.0) License, 01 June 2019 | Attribution-ShareAlike 4.0 International | Released under a Creative Commons | https://github.com/TheLittleEngineers | I LOVE YOU DAD! | Turner, 1945 - 2019. Rest In Peace. | In Memory of my Father, Robert Embry | (CC BY-SA 4.0) License, 01 June 2019 | Attribution-ShareAlike 4.0 International | Released under a Creative Commons | https://github.com/TheLittleEngineers | I LOVE YOU DAD! | Turner, 1945 - 2019. Rest In Peace. | In Memory of my Father, Robert Embry | (CC BY-SA 4.0) License, 01 June 2019 | Attribution-ShareAlike 4.0 International | Released under a Creative Commons | https://github.com/TheLittleEngineers | I LOVE YOU DAD! | Turner, 1945 - 2019. Rest In Peace. | In Memory of my Father, Robert Embry | (CC BY-SA 4.0) License, 01 June 2019 | Attribution-ShareAlike 4.0 International | Released under a Creative Commons | https://github.com/TheLittleEngineers | I LOVE YOU DAD! | Turner, 1945 - 2019. Rest In Peace. | In Memory of my Father, Robert Embry | (CC BY-SA 4.0) License, 01 June 2019 | Attribution-ShareAlike 4.0 International | Released under a Creative Commons | https://github.com/TheLittleEngineers | I LOVE YOU DAD! | Turner, 1945 - 2019. Rest In Peace. | In Memory of my Father, Robert Embry | (CC BY-SA 4.0) License, 01 June 2019 | Attribution-ShareAlike 4.0 International | Released under a Creative Commons | https://github.com/TheLittleEngineers | I LOVE YOU DAD! | Turner, 1945 - 2019. Rest In Peace. | In Memory of my Father, Robert Embry | (CC BY-SA 4.0) License, 01 June 2019 | Attribution-ShareAlike 4.0 International | Released under a Creative Commons | https://github.com/TheLittleEngineers